# Altium PCB SiLPA.PcbDoc (part 8 of 10)
Units mm, origin at the board's own origin, x right, y up, seen from the top; angles counter-clockwise.
Board outline 222.36 x 100 mm, 4 copper layers (L1, P2, L3, L4), stack 1.598 mm thick; 583 components, 330 nets, 1692 pads, 1781 vias.
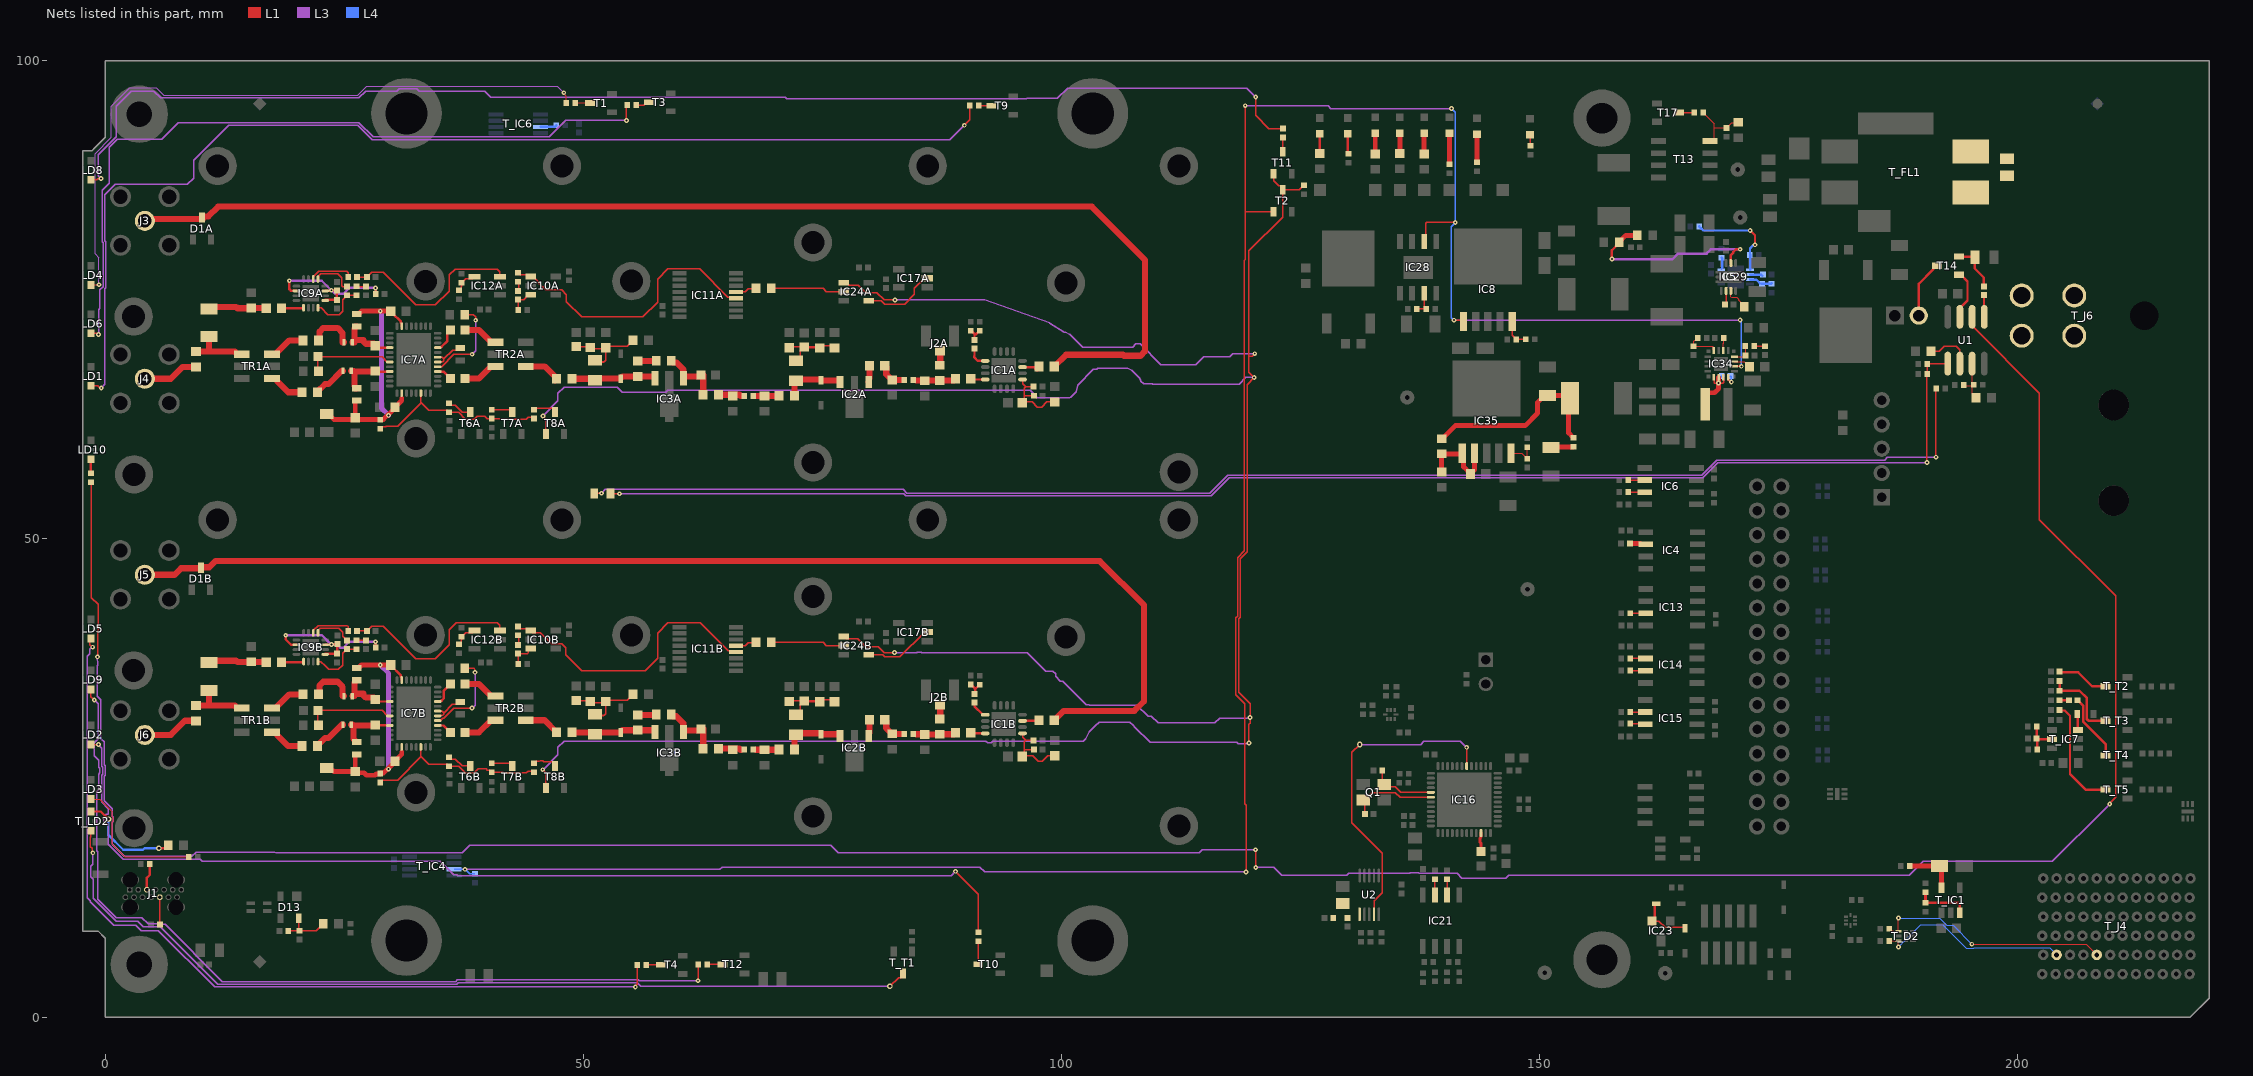
[diagram p8: the nets of this part, all layers, seen from the top]

## Via types
v1: diameter 0.5, hole 0.2, L1 to L4, tented both sides, 1301 vias
v2: diameter 0.6, hole 0.3, L1 to L4, tented both sides, 443 vias
v3: diameter 0.8, hole 0.5, L1 to L4, tented both sides, 25 vias
v4: diameter 0.5, hole 0.2, L1 to L4, 8 vias
v5: diameter 1.27, hole 0.711, L1 to L4, tented both sides, 4 vias

## Nets (pads, with @x,y where several pads share a name; then routed paths per layer and width w, separated by ;. In a path a pad name is that pad's centre, name@x,y a point inside that pad or via, vN(x,y) a via of type N, cw(c..) or ccw(c..) an arc to the next point about the centre after c; other vN are vias at no path point) (continued)
LDAC: IC16.42 U2.4 | length 33.4
  L1 w0.152: v2(131.169,28.501) 130.337,27.669 130.337,20.317 133.534,17.12 133.534,13.025 132.663,12.154 U2.4@132.663,10.75 ; IC16.42@142.353,26.192 v1(142.353,28.208)
  L3 w0.152: v2(131.169,28.501) 137.525,28.501 137.863,28.839 141.702,28.839 142.333,28.208 v1(142.353,28.208)
LED_bias00: LD4.1 R11.1 | length 70.7
  L1 w0.127: LD4.1@-1.5,76.559 -1.484,76.575 v1(-0.662,76.575) ; v1(47.95,96.65) 47.95,96.549 48.205,96.294 48.205,95.615 R11.1@48.22,95.6
  L3 w0.127: v1(-0.662,76.575) -0.662,79.398 -1.07,79.806 -1.07,90.274 0.643,91.988 0.643,95.233 2.566,97.156 5.332,97.156 6.096,96.392 26.391,96.392 27.357,97.358 47.242,97.358 v1(47.95,96.65)
LED_bias01: LD6.1 R12.1 | length 79.1
  L1 w0.152: LD6.1@-1.5,71.5 -0.878,71.5 -0.753,71.375 v1(-0.7,71.375) ; v1(54.5,93.754) 54.5,95.265 R12.1@54.595,95.36
  L3 w0.152: v1(-0.7,71.375) -0.7,73.969 -0.563,74.106 -0.563,76.033 -0.209,76.387 -0.209,80.962 -0.321,81.075 -0.321,86.441 0.428,87.19 0.428,90.975 1.239,91.785 5.903,91.785 7.647,93.529 26.509,93.529 28.009,92.029 46.447,92.029 48.171,93.754 v1(54.5,93.754)
LED_bias10: LD5.1 R14.1 | length 91.2
  L1 w0.152: LD5.1@-1.5,39.582 -1.625,39.457 -1.625,38.921 -1.384,38.68 v1(-1.316,38.68) ; v1(55.425,3.15) 55.425,3.244 55.606,3.425 55.606,5.438 R14.1@55.636,5.468
  L3 w0.152: v1(-1.316,38.68) -1.384,38.68 -1.625,38.439 -1.625,37.985 -1.88,37.73 -1.88,12.499 -1.553,12.172 -1.553,12.057 0.903,9.6 3.175,9.6 3.758,9.017 5.558,9.017 11.425,3.15 v1(55.425,3.15)
LED_bias11: LD9.1 R15.1 | length 91
  L1 w0.152: LD9.1@-1.5,34.25 -1.5,33.517 v1(-1.153,33.17) ; v1(61.979,3.797) 61.979,5.478 R15.1@62.009,5.508
  L3 w0.152: v1(-1.153,33.17) -0.734,32.752 -0.734,29.107 -1.153,28.688 -1.153,27.348 -0.671,26.865 -0.671,26.133 -0.563,26.025 -0.563,25.525 -0.671,25.417 -0.671,23.751 -0.878,23.544 -0.878,17.393 -0.774,17.289 -0.774,12.344 1.169,10.4 3.829,10.4 4.485,9.743 5.856,9.743 5.905,9.693 6.249,9.693 12.234,3.709 36.624,3.709 36.815,3.9 55.711,3.9 55.814,3.797 v1(61.979,3.797)
LED_DIS0: LD1.1 R74.1 | length 119.2
  L1 w0.152: LD1.1@-1.5,66.021 -0.765,66.021 -0.519,65.775 v1(-0.425,65.775) ; v1(89.825,93.25) 90.409,93.834 R74.1@90.409,95.3
  L3 w0.152: v1(-0.425,65.775) -0.042,66.158 -0.042,76.159 0.071,76.272 0.071,81.078 -0.042,81.191 -0.042,85.997 1.054,87.093 8.56,87.093 8.59,87.063 9.226,87.699 9.226,89.592 12.884,93.25 26.394,93.25 27.894,91.75 88.325,91.75 v1(89.825,93.25)
LED_DIS1: LD2.1 R84.1 | length 110
  L1 w0.152: LD2.1@-1.5,28.5 v1(-0.7,28.5) ; v1(88.9,15.24) 91.3,12.84 R84.1@91.3,8.87 R84.1@91.3,8.8
  L3 w0.152: v1(-0.7,28.5) -0.7,28.441 -0.391,28.132 -0.391,26.248 -0.283,26.141 -0.283,25.409 -0.391,25.302 -0.391,22.494 0.328,21.775 0.328,21.2 0.12,21.2 -0.175,20.905 -0.175,20.488 0.12,20.193 0.328,20.193 0.328,18.063 1.863,16.528 9.931,16.528 10.159,16.3 35,16.3 36.418,14.883 36.774,14.883 36.869,14.787 88.446,14.787 v1(88.9,15.24)
LED_OVT: LD8.1 R64.1 | length 136.7
  L1 w0.152: LD8.1@-1.5,87.55 -0.919,87.55 -0.802,87.667 -0.446,87.667 v1(-0.438,87.675) ; v1(120.3,96.2) 120.3,94.292 121.678,92.914 R64.1@123.14,92.914
  L3 w0.152: v1(-0.438,87.675) -0.758,87.995 -0.758,90.181 1.123,92.061 1.123,95.251 2.697,96.825 5.088,96.825 5.788,96.125 26.501,96.125 27.212,96.836 30.478,96.836 30.733,97.092 32.561,97.092 32.817,96.836 39.689,96.836 40.328,96.197 52.806,96.197 52.812,96.203 71.115,96.203 71.271,96.047 96.34,96.047 96.372,96.078 98.749,96.078 98.767,96.096 99.184,96.096 99.202,96.078 99.545,96.078 100.613,97.147 119.353,97.147 v1(120.3,96.2)
LED_P3V3: LD3.1 R13.1 | length 14.8
  L1 w0.127: LD3.1@-1.5,22.8 -0.597,22.8 0.75,21.453 0.75,20.968 0.819,20.9 0.819,20.493 0.75,20.424 0.75,18.054 2.049,16.754 R13.1@8.73,16.754
NetC1A_1: C1A.1 IC1A.9 | length 2.2
  L1 w0.254: C1A.1@90.89,69.89 90.89,69.137 90.875,69.121 90.875,68.98 91.234,68.621 IC1A.9@92.012,68.621
NetC1A_2: C1A.2 R1A.2 R2A.2 | length 1.9
  L1 w0.254: R1A.2@90.5,71.78 90.52,71.78 90.89,71.41 ; C1A.2@90.89,70.79 90.89,71.41 ; R2A.2@91.44,71.77 91.42,71.77 91.06,71.41 90.89,71.41
NetC1B_1: C1B.1 IC1B.9 | length 1.9
  L1 w0.254: C1B.1@90.89,32.89 90.89,32.493 91.762,31.621 IC1B.9@92.012,31.621
NetC1B_2: C1B.2 R1B.2 R2B.2 | length 1.6
  L1 w0.254: R1B.2@90.5,34.78 90.52,34.78 90.925,34.375 90.925,34.35 ; C1B.2@90.89,33.79 90.953,33.853 90.953,34.303 R2B.2@91.3,34.65
NetC2A_2: C2A.2 C15A.2 IC3A.1 R3A.1 | length 6.6
  L1 w0.643: R3A.1@59.2,68.64 59.2,68.59 59.329,68.461 59.699,68.461 60.441,67.719 60.441,67.244 60.444,67.242 60.475,67.242 IC3A.1@60.475,67.001 ; IC3A.1@60.475,66.815 IC3A.1@60.475,67.001 ; C2A.2@62.31,67.12 62.158,66.968 60.509,66.968 IC3A.1@60.475,67.001 ; C15A.2@62.52,65.07 C2A.2@62.52,67.15
NetC2B_2: C2B.2 C15B.2 IC3B.1 R3B.1 | length 6.6
  L1 w0.643: R3B.1@59.2,31.64 59.2,31.59 59.329,31.461 59.699,31.461 60.441,30.719 60.441,30.244 60.444,30.242 60.475,30.242 IC3B.1@60.475,30.001 ; IC3B.1@60.475,29.815 IC3B.1@60.475,30.001 ; C2B.2@62.31,30.12 62.158,29.968 60.509,29.968 IC3B.1@60.475,30.001 ; C15B.2@62.52,28.07 C2B.2@62.52,30.15
NetC3A_1: C3A.1 R3A.2 | length 1.9
  L1 w0.643: C3A.1@55.69,68.6 57.56,68.6 R3A.2@57.6,68.64
NetC3A_2: C3A.2 C16A.1 D3A.2 IC3A.3 L4A.2 | length 9
  L1 w0.643: C16A.1@48.78,66.771 48.798,66.753 L4A.2@51.182,66.753 ; L4A.2@51.2,66.735 L4A.2@51.182,66.753 ; C3A.2@55.69,66.99 57.441,66.99 57.475,66.956 IC3A.3@57.475,66.815 ; C3A.2@55.69,67 54.073,67 53.89,66.817 D3A.2@53.89,66.76 51.189,66.76 L4A.2@51.182,66.753
NetC3B_1: C3B.1 R3B.2 | length 1.9
  L1 w0.643: C3B.1@55.69,31.6 57.56,31.6 R3B.2@57.6,31.64
NetC3B_2: C3B.2 C16B.1 D3B.2 IC3B.3 L4B.2 | length 9
  L1 w0.643: C16B.1@48.78,29.771 48.798,29.753 L4B.2@51.182,29.753 ; L4B.2@51.2,29.735 L4B.2@51.182,29.753 ; C3B.2@55.69,29.99 57.441,29.99 57.475,29.956 IC3B.3@57.475,29.815 ; C3B.2@55.69,30 54.073,30 53.89,29.817 D3B.2@53.89,29.76 51.189,29.76 L4B.2@51.182,29.753
NetC4A_2: C4A.2 C5A.2 C6A.2 L1A.2 L3A.1 | length 8.4
  L1 w0.152: C6A.2@71.52,69.99 71.61,70.08 73.125,70.08 74.609,70.08 C5A.2@74.715,69.974 74.941,70.2 76.02,70.2 L1A.2@76.25,69.97 ; L3A.1@72.22,68.648 72.676,69.104 72.676,69.651 73.075,70.05 C4A.2@73.1,70.05 ; C4A.2@73.125,70.05 73.176,69.999 C5A.2@74.715,69.999
NetC4B_2: C4B.2 C5B.2 C6B.2 L1B.2 L3B.1 | length 8.4
  L1 w0.152: C6B.2@71.52,32.99 71.61,33.08 73.125,33.08 74.609,33.08 C5B.2@74.715,32.974 74.941,33.2 76.02,33.2 L1B.2@76.25,32.97 ; L3B.1@72.22,31.693 72.265,31.693 72.676,32.104 72.676,32.651 73.075,33.05 C4B.2@73.1,33.05 ; C4B.2@73.125,33.05 73.176,32.999 C5B.2@74.715,32.999
NetC7A_2: C7A.2 C8A.2 C9A.2 L2A.1 L4A.1 | length 11.7
  L1 w0.152: C9A.2@49.26,70.1 50.615,70.1 50.847,70.1 50.756,70.009 C8A.2@50.731,70.009 50.86,69.88 51.659,69.88 52.2,69.88 C7A.2@52.31,69.99 ; L4A.1@50.885,68.86 L4A.1@51.2,68.545 ; L2A.1@55.19,70.77 55.19,70.745 54.576,70.131 52.734,70.131 52.31,69.707 C7A.2@52.31,69.702 ; L4A.1@51.2,68.545 52.15,68.545 52.31,68.705 ; L4A.1@51.2,68.545 51.26,68.485 52.09,68.485 52.31,68.705 ; 52.31,68.705 C7A.2@52.31,69.702 ; C7A.2@52.31,69.702 C7A.2@52.31,69.99 ; C7A.2@52.31,69.99 52.594,70.274 C7A.2@52.31,69.99
NetC7B_2: C7B.2 C8B.2 C9B.2 L2B.1 L4B.1 | length 11.7
  L1 w0.152: C9B.2@49.26,33.1 50.615,33.1 50.847,33.1 50.756,33.009 C8B.2@50.731,33.009 50.86,32.88 51.659,32.88 52.2,32.88 C7B.2@52.31,32.99 ; L4B.1@50.885,31.86 L4B.1@51.2,31.545 ; L2B.1@55.19,33.77 55.19,33.745 54.576,33.131 52.734,33.131 52.31,32.707 C7B.2@52.31,32.702 ; L4B.1@51.2,31.545 51.26,31.485 52.09,31.485 52.31,31.705 ; L4B.1@51.2,31.545 52.15,31.545 52.31,31.705 ; 52.31,31.705 C7B.2@52.31,32.702 ; C7B.2@52.31,32.702 C7B.2@52.31,32.99 ; C7B.2@52.31,32.99 52.594,33.274 C7B.2@52.31,32.99
NetC11A_1: C11A.1 D1A.3 J3.1 | length 127.6
  L1 w0.643: J3.1@4.134,83.25 4.355,83.471 10.211,83.471 10.112,83.571 10.112,83.72 10.115,83.724 10.778,83.724 11.805,84.75 103.15,84.75 108.716,79.184 108.716,69.608 108.263,69.155 106.54,69.155 106.432,69.263 100.463,69.263 C11A.1@99.23,68.03
NetC11A_2: C11A.2 IC1A.3 | length 1.9
  L1 w0.254: IC1A.3@95.912,67.971 97.332,67.971 C11A.2@97.451,67.851
  L1 w0.643: C11A.2@97.451,67.851 97.476,67.851 97.63,68.005 C11A.2@97.63,68.03
NetC11B_1: C11B.1 D1B.3 J5.1 | length 127.3
  L1 w0.643: J5.1@4.134,46.25 7.246,46.25 7.934,46.938 9.996,46.938 10,46.941 10,47.041 10.004,47.044 10.871,47.044 11.517,47.69 104.009,47.69 108.6,43.099 108.6,33 107.618,32.018 100.218,32.018 C11B.1@99.23,31.03
NetC11B_2: C11B.2 IC1B.3 | length 1.8
  L1 w0.254: IC1B.3@95.912,30.971 97.596,30.971 C11B.2@97.63,31.005
  L1 w0.643: C11B.2@97.63,31.005 C11B.2@97.63,31.03
NetC12A_1: C12A.1 IC1A.12 | length 1.5
  L1 w0.254: C12A.1@90.5,66.75 90.579,66.671 IC1A.12@92.012,66.671
NetC12A_2: C12A.2 R4A.2 R6A.1 R7A.2 | length 4.2
  L1 w0.643: 84.777,66.58 85.64,66.58 R7A.2@85.67,66.55 85.68,66.56 87.25,66.56 R4A.2@87.26,66.57 88.745,66.57 88.9,66.725 C12A.2@88.9,66.75
NetC12B_1: C12B.1 IC1B.12 | length 1.5
  L1 w0.254: C12B.1@90.5,29.75 90.579,29.671 IC1B.12@92.012,29.671
NetC12B_2: C12B.2 R4B.2 R6B.1 R7B.2 | length 4.2
  L1 w0.643: 84.777,29.58 85.64,29.58 R7B.2@85.67,29.55 85.68,29.56 87.25,29.56 R4B.2@87.26,29.57 88.745,29.57 88.9,29.725 C12B.2@88.9,29.75
NetC13A_1: C13A.1 R6A.2 R8A.2 | length 2.9
  L1 w0.643: C13A.1@81.5,68.1 81.654,67.946 81.654,67.216 82.25,66.62 R6A.2@83.369,66.62
NetC13A_2: C13A.2 IC2A.1 | length 1.7
  L1 w0.643: IC2A.1@79.833,66.394 79.862,66.423 79.862,66.756 79.9,66.794 C13A.2@79.9,68.1
NetC13B_1: C13B.1 R6B.2 R8B.2 | length 2.9
  L1 w0.643: C13B.1@81.5,31.1 81.654,30.946 81.654,30.216 82.25,29.62 R6B.2@83.369,29.62
NetC13B_2: C13B.2 IC2B.1 | length 1.4
  L1 w0.643: IC2B.1@79.875,29.675 79.9,29.7 C13B.2@79.9,31.1
NetC14A_1: C14A.1 D2A.2 IC2A.3 L3A.2 | length 6.6
  L1 w0.643: C14A.1@72.05,64.979 72.05,66.505 72.22,66.675 74.85,66.675 D2A.2@74.85,66.58 76.804,66.58 76.833,66.551 IC2A.3@76.833,66.394
NetC14A_2: C14A.2 R5A.1 R9A.2 | length 2.4
  L1 w0.643: R5A.1@68.04,64.959 70.431,64.959 C14A.2@70.45,64.979
NetC14B_1: C14B.1 D2B.2 IC2B.3 L3B.2 | length 6.6
  L1 w0.643: C14B.1@72.05,27.979 72.05,29.505 72.22,29.675 74.85,29.675 D2B.2@74.85,29.58 76.804,29.58 76.833,29.551 IC2B.3@76.833,29.394
NetC14B_2: C14B.2 R5B.1 R9B.2 | length 2.4
  L1 w0.643: R5B.1@68.04,27.959 70.431,27.959 C14B.2@70.45,27.979
NetC15A_1: C15A.1 R5A.2 R10A.2 | length 2.4
  L1 w0.643: C15A.1@64.12,65.07 66.32,65.07 66.45,64.94
NetC15B_1: C15B.1 R5B.2 R10B.2 | length 2.4
  L1 w0.643: C15B.1@64.12,28.07 66.32,28.07 66.45,27.94
NetC16A_2: C16A.2 TR2A.3 | length 4.1
  L1 w0.643: TR2A.3@43.965,68.033 45.944,68.033 47.027,66.95 47.027,66.596 C16A.2@47.18,66.75
NetC16B_2: C16B.2 TR2B.3 | length 3.8
  L1 w0.643: TR2B.3@43.965,31.033 45.944,31.033 47.18,29.796 C16B.2@47.18,29.771
NetC17A_1: C17A.1 C18A.2 C19A.2 IC1A.1 L5A.1 | length 8.3
  L1 w0.152: C18A.2@95.89,64.25 C18A.2@95.97,64.33 ; IC1A.1@95.912,66.671 95.912,66.242 96.224,65.93 ; C17A.1@97.08,65.93 96.224,65.93 ; C19A.2@97.09,64.97 96.068,64.97 ; L5A.1@99.29,64.33 98.465,64.33 97.922,63.787 97.473,63.787 96.93,64.33 C18A.2@95.97,64.33 ; C18A.2@95.97,64.33 96.068,64.428 96.068,64.97 ; 96.068,64.97 96.068,65.774 96.224,65.93
NetC17B_1: C17B.1 C18B.2 C19B.2 IC1B.1 L5B.1 | length 8.4
  L1 w0.152: C18B.2@95.89,27.25 C18B.2@95.97,27.33 ; IC1B.1@95.912,29.671 95.912,29.242 96.224,28.93 ; C17B.1@97.08,28.93 96.224,28.93 ; C19B.2@97.09,27.97 96.068,27.97 ; L5B.1@99.29,27.33 98.531,27.33 97.947,26.747 97.572,26.747 96.989,27.33 C18B.2@95.97,27.33 ; C18B.2@95.97,27.33 96.068,27.428 96.068,27.97 ; 96.068,27.97 96.068,28.774 96.224,28.93
NetC20_2: C20.2 C21.2 FB3.1 U2.1
NetC24_2: C24.2 L6.2 L7.1 R99.2 | length 20.5
  L1 w0.508: L7.1@139.744,60.487 139.794,60.487 141.157,61.85 148.458,61.85 149.773,63.165 149.773,64.298 150.475,65 C24.2@150.8,65 152.85,65 L6.2@153.15,64.7 153.005,64.555 153.005,61.085 153.461,60.629 153.461,60.609 153.497,60.573 R99.2@153.517,60.573
NetC26_2: C26.2 IC35.1 IC35.2 L7.2 R97.1 | length 8.8
  L1 w0.508: R97.1@139.724,57 139.734,57.01 139.734,58.877 L7.2@139.744,58.887 141.831,58.887 142.026,58.692 142.026,57.531 C26.2@142.744,56.813 ; C26.2@142.744,56.788 C26.2@142.744,56.813 ; IC35.2@143.17,58.955 143.17,57.239 C26.2@142.744,56.813
NetC36_1: C36.1 IC5.9 | length 1.5
  L1 w0.152: C36.1@169.25,74.5 169.479,74.729 IC5.9@169.479,75.94
NetC39A_2: C39A.2 C48A.2 C49A.2 IC7A.19 IC7A.34 L11A.1 L12A.2 L15A.2 R19A.1 | length 28.3
  L1 w0.254: C48A.2@30.05,73.625 30.05,73.585 30.904,72.731 30.904,72.608 31,72.512 IC7A.19@31,72.25
  L1 w0.508: L11A.1@23.16,63.06 23.335,63.06 23.889,62.506 C39A.2@26.305,62.506 ; C39A.2@26.01,62.762 26.136,62.887 26.136,64.404 26.202,64.47 L15A.2@26.285,64.47 ; C39A.2@26.136,62.675 C39A.2@26.305,62.506 ; L12A.2@26.286,73.505 26.476,73.505 26.786,73.815 v1(28.75,73.815) C48A.2@29.845,73.815 29.845,73.79 C48A.2@30.05,73.585 ; 31,64.75 31,64.475 30.3,63.775 C49A.2@30.3,63.75 30.3,63.725 29.081,62.506 C39A.2@26.305,62.506
  L3 w0.508: v1(28.75,73.815) 28.881,73.684 28.881,63.667 v1(29.625,62.923)
NetC39B_2: C39B.2 C48B.2 C49B.2 IC7B.19 IC7B.34 L11B.1 L12B.2 L15B.2 R19B.1 | length 28.2
  L1 w0.254: C48B.2@29.845,36.815 29.845,36.79 30.904,35.731 30.904,35.608 31,35.512 IC7B.19@31,35.25
  L1 w0.508: L11B.1@23.16,26.06 23.431,25.789 23.79,25.789 23.904,25.675 26.01,25.675 26.136,25.8 26.136,27.404 26.202,27.47 L15B.2@26.285,27.47 ; C39B.2@26.136,25.675 26.259,25.552 27.049,25.552 27.31,25.292 28.211,25.292 28.354,25.434 28.714,25.434 R19B.1@28.75,25.47 28.786,25.506 29.081,25.506 30.3,26.725 C49B.2@30.3,26.75 30.3,26.775 31,27.475 31,27.75 ; L12B.2@26.286,36.505 26.476,36.505 26.786,36.815 v1(28.75,36.815) C48B.2@29.845,36.815
  L3 w0.508: v1(28.75,36.815) 29.625,35.94 v1(29.625,25.923)
NetC41A_1: C41A.1 IC7A.24 L12A.1 L13A.1 | length 6.2
  L1 w0.254: C41A.1@28.25,70.25 28.5,70 IC7A.24@29.75,70
  L1 w0.643: L13A.1@25.852,70.56 26.063,70.56 26.063,70.81 ; L12A.1@26.286,72.225 26.099,72.225 26.098,72.224 26.098,72.036 26.063,72.001 26.063,70.81 ; C41A.1@28.25,70.25 28.096,70.404 27.243,70.404 26.983,70.664 26.983,70.81 26.063,70.81
NetC41B_1: C41B.1 IC7B.24 L12B.1 L13B.1 | length 6.2
  L1 w0.254: C41B.1@28.096,33.404 28.5,33 IC7B.24@29.75,33
  L1 w0.643: L13B.1@25.852,33.56 26.063,33.56 26.063,33.81 ; L12B.1@26.286,35.225 26.099,35.225 26.098,35.224 26.098,35.036 26.063,35.001 26.063,33.81 ; C41B.1@28.096,33.404 27.243,33.404 26.983,33.664 26.983,33.81 26.063,33.81
NetC42A_1: C42A.1 TR2A.6 | length 3.7
  L1 w0.643: C42A.1@37.614,71.849 39.064,71.849 40.34,70.573 TR2A.6@40.785,70.573
NetC42A_2: C42A.2 IC7A.9 | length 2.6
  L1 w0.254: IC7A.9@34.75,70 35.012,70 35.108,70.096 35.167,70.096 35.766,70.695 35.766,71.501 C42A.2@36.114,71.849
NetC42B_1: C42B.1 TR2B.6 | length 3.7
  L1 w0.643: C42B.1@37.614,34.849 39.064,34.849 40.34,33.573 TR2B.6@40.785,33.573
NetC42B_2: C42B.2 IC7B.9 | length 2.6
  L1 w0.254: IC7B.9@34.75,33 35.012,33 35.108,33.096 35.167,33.096 35.407,33.335 35.407,34.141 C42B.2@36.114,34.849
NetC43A_1: C43A.1 L13A.2 | length 4.9
  L1 w0.643: C43A.1@22.29,70.75 22.409,70.869 22.409,71.684 22.786,72.06 24.283,72.06 24.82,71.522 24.82,70.564 24.824,70.56 L13A.2@24.967,70.56
NetC43A_2: C43A.2 TR1A.4 | length 3.9
  L1 w0.643: TR1A.4@17.445,69.317 17.89,69.317 17.949,69.376 17.949,69.448 19.251,70.75 C43A.2@20.69,70.75 C43A.2@20.69,70.725
NetC43B_1: C43B.1 L13B.2 | length 4.9
  L1 w0.643: C43B.1@22.29,33.75 22.409,33.869 22.409,34.684 22.786,35.06 24.283,35.06 24.82,34.522 24.82,33.564 24.824,33.56 L13B.2@24.967,33.56
NetC43B_2: C43B.2 TR1B.4 | length 3.9
  L1 w0.643: TR1B.4@17.445,32.317 17.89,32.317 17.949,32.376 17.949,32.448 19.251,33.75 C43B.2@20.69,33.75
NetC44A_1: C44A.1 R73A.2 TR1A.3 | length 6.8
  L1 w0.643: C44A.1@9.488,69.58 10.807,69.58 ; R73A.2@10.515,71.153 R73A.2@10.84,71.153 10.84,69.613 10.807,69.58 ; TR1A.3@14.265,69.317 13.82,69.317 13.557,69.58 10.807,69.58
NetC44A_2: C44A.2 J4.1 | length 5.9
  L1 w0.643: J4.1@4.134,66.75 6.851,66.75 8.081,67.98 C44A.2@9.488,67.98
NetC44B_1: C44B.1 R73B.2 TR1B.3 | length 6.5
  L1 w0.643: C44B.1@9.488,32.58 10.807,32.58 ; R73B.2@10.84,34.153 10.84,32.613 10.807,32.58 ; TR1B.3@14.265,32.317 13.82,32.317 13.557,32.58 10.807,32.58
NetC44B_2: C44B.2 J6.1 | length 6
  L1 w0.643: J6.1@4.134,29.5 6.851,29.5 8.331,30.98 C44B.2@9.488,30.98
NetC45A_1: C45A.1 TR2A.4 | length 3.7
  L1 w0.643: C45A.1@37.6,66.758 39.065,66.758 40.34,68.033 TR2A.4@40.785,68.033
NetC45A_2: C45A.2 IC7A.4 | length 1.8
  L1 w0.254: IC7A.4@34.75,67.5 34.759,67.491 35.367,67.491 C45A.2@36.1,66.758
  L1 w0.643: C45A.2@36.1,66.758 C45A.2@36.1,66.894
NetC45B_1: C45B.1 TR2B.4 | length 3.9
  L1 w0.643: C45B.1@37.753,29.912 C45B.1@37.6,29.758 39.065,29.758 40.34,31.033 TR2B.4@40.785,31.033
NetC45B_2: C45B.2 IC7B.4 | length 1.8
  L1 w0.254: IC7B.4@34.75,30.5 34.759,30.491 35.367,30.491 C45B.2@36.1,29.758
  L1 w0.643: C45B.2@36.1,29.758 C45B.2@36.1,29.894
NetC46A_1: C46A.1 L17A.2 | length 3.6
  L1 w0.643: C46A.1@22.17,65.344 22.17,65.369 23.001,66.2 23.343,66.2 24.719,67.576 L17A.2@24.861,67.576
NetC46A_2: C46A.2 TR1A.6 | length 3.9
  L1 w0.643: TR1A.6@17.445,66.777 17.89,66.777 17.949,66.718 17.949,66.526 19.131,65.344 C46A.2@20.57,65.344 C46A.2@20.57,65.369
NetC46B_1: C46B.1 L17B.2 | length 3.6
  L1 w0.643: C46B.1@22.17,28.344 22.17,28.369 23.001,29.2 23.343,29.2 24.719,30.576 L17B.2@24.861,30.576
NetC46B_2: C46B.2 TR1B.6 | length 3.9
  L1 w0.643: TR1B.6@17.445,29.777 17.89,29.777 17.949,29.718 17.949,29.526 19.131,28.344 C46B.2@20.57,28.344 C46B.2@20.57,28.369
NetC47A_2: C47A.2 IC7A.29 L15A.1 L17A.1 | length 6
  L1 w0.254: C47A.2@28.25,67.5 IC7A.29@29.75,67.5
  L1 w0.643: L17A.1@25.711,67.576 25.715,67.572 25.981,67.572 26.054,67.5 ; L15A.1@26.285,65.75 26.098,65.75 26.096,65.751 26.096,65.939 26.058,65.978 26.058,66.523 26.054,66.523 26.054,67.5 ; C47A.2@28.25,67.5 26.054,67.5
NetC47B_2: C47B.2 IC7B.29 L15B.1 L17B.1 | length 6.1
  L1 w0.254: C47B.2@28.25,30.5 IC7B.29@29.75,30.5
  L1 w0.643: L17B.1@25.711,30.576 25.854,30.576 25.93,30.5 28.2,30.5 C47B.2@28.25,30.55 ; 25.958,30.5 25.958,29.077 26.096,28.939 26.096,28.751 26.098,28.75 L15B.1@26.285,28.75
NetC50A_2: C50A.2 IC7A.27 R21A.2 | length 9.3
  L1 w0.152: R21A.2@22.29,67.521 22.24,67.571 C50A.2@22.24,69.06 28.94,69.06 29.5,68.5 IC7A.27@29.75,68.5
NetC50B_2: C50B.2 IC7B.27 R21B.2 | length 9.3
  L1 w0.152: R21B.2@22.29,30.521 22.24,30.571 C50B.2@22.24,32.06 28.94,32.06 29.5,31.5 IC7B.27@29.75,31.5
NetC51A_1: C51A.1 IC10A.3 R52A.2 | length 2.6
  L1 w0.152: R52A.2@43.16,73.92 C51A.1@43.16,75.03 43.74,75.03 44.24,75.53 IC10A.3@44.49,75.53
NetC51A_2: C51A.2 R23A.1 | length 1.1
  L1 w0.152: C51A.2@43.16,75.93 43.25,76.02 R23A.1@43.25,77
NetC51B_1: C51B.1 IC10B.3 R52B.2 | length 3.2
  L1 w0.152: C51B.1@43.16,38.03 C51B.1@43.16,38 ; R52B.2@43.186,36.92 43.16,36.946 C51B.1@43.16,37.84 ; C51B.1@43.186,37.814 C51B.1@43.16,37.84 ; IC10B.3@44.49,38.53 44.474,38.53 44.25,38.306 44.25,38.089 44.161,38 C51B.1@43.16,38 ; C51B.1@43.16,37.84 C51B.1@43.16,38 ; C51B.1@43.16,37.84 43,38 C51B.1@43.16,38
NetC51B_2: C51B.2 R23B.1 | length 1.1
  L1 w0.152: C51B.2@43.16,38.93 43.25,39.02 R23B.1@43.25,40
NetC52A_1: C52A.1 R27A.2 R73A.1 | length 6.1
  L1 w0.643: R73A.1@10.84,74.053 11.048,74.26 13.68,74.26 13.825,74.115 R27A.2@15.28,74.115 ; R27A.2@15.28,74.15 15.295,74.135 16.815,74.135 C52A.1@16.83,74.12
NetC52A_2: C52A.2 IC9A.1 | length 2.4
  L1 w0.254: C52A.2@18.43,74.12 20.719,74.12 20.74,74.141 IC9A.1@20.74,74.18
NetC52B_1: C52B.1 R27B.2 R73B.1 | length 6.1
  L1 w0.643: R73B.1@10.84,37.053 11.048,37.26 13.68,37.26 13.825,37.115 R27B.2@15.28,37.115 ; R27B.2@15.28,37.15 15.295,37.135 16.815,37.135 C52B.1@16.83,37.12
NetC52B_2: C52B.2 IC9B.1 | length 2.4
  L1 w0.254: C52B.2@18.43,37.12 20.719,37.12 20.74,37.141 IC9B.1@20.74,37.18
NetC53A_2: C53A.2 IC12A.3 R24A.2 | length 19.6
  L1 w0.152: R24A.2@26.322,77.375 27.141,77.375 27.25,77.484 C53A.2@27.25,77.5 ; C53A.2@27.375,77.375 27.761,77.762 27.761,77.769 27.88,77.888 29.051,77.888 32.472,74.467 34.528,74.467 35.983,75.922 35.983,77.599 36.597,78.213 40.985,78.213 41.25,77.948 IC12A.3@41.25,77.5
NetC53B_2: C53B.2 IC12B.3 R24B.2 | length 19.5
  L1 w0.152: R24B.2@26.322,40.375 27.141,40.375 27.25,40.484 C53B.2@27.25,40.5 ; C53B.2@27.375,40.375 27.761,40.762 27.761,40.769 27.88,40.888 29.051,40.888 32.472,37.467 34.528,37.467 35.983,38.922 35.983,40.517 36.678,41.213 40.985,41.213 41.25,40.948 IC12B.3@41.25,40.5
NetC54A_1: C54A.1 IC9A.4 R31A.2 | length 6.2
  L1 w0.152: IC9A.4@22.24,74.18 22.566,74.18 23.28,73.467 24.483,73.467 24.828,73.812 24.828,75.021 C54A.1@25.286,75.48 25.52,75.714 25.52,75.46 R31A.2@26.275,75.46
NetC54A_2: C54A.2 IC9A.9 | length 4.4
  L1 w0.152: IC9A.9@22.24,77.18 22.24,77.43 22.517,77.707 24.312,77.707 24.725,77.295 24.725,76.469 24.814,76.38 C54A.2@25.286,76.38
NetC54B_1: C54B.1 IC9B.4 R31B.2 | length 6.3
  L1 w0.152: IC9B.4@22.24,37.18 22.548,37.18 22.992,36.735 23.366,36.362 24.378,36.362 24.828,36.812 24.828,38.021 C54B.1@25.286,38.48 25.52,38.714 25.52,38.46 R31B.2@26.275,38.46
NetC54B_2: C54B.2 IC9B.9 | length 4.2
  L1 w0.152: IC9B.9@22.24,40.18 22.24,40.43 22.466,40.656 24.428,40.656 24.837,40.247 24.837,39.829 C54B.2@25.286,39.38
NetC55A_1: C55A.1 R31A.1 | length 1
  L1 w0.152: R31A.1@26.275,76.4 26.295,76.38 C55A.1@27.27,76.38
NetC55B_1: C55B.1 R31B.1 | length 1
  L1 w0.152: R31B.1@26.275,39.4 26.295,39.38 C55B.1@27.27,39.38
NetC59A_2: C59A.2 C60A.1 FB2A.2 IC9A.5 IC9A.7 IC9A.14 | length 15.6
  L1 w0.254: v1(19.245,77) 19.245,76.121 19.436,75.93 IC9A.14@19.99,75.93 ; IC9A.7@22.99,75.93 22.999,75.939 23.453,75.939 23.467,75.953 23.534,75.953 23.581,76 23.591,75.99 24.24,75.99 C60A.1@24.25,76 ; IC9A.5@23,75 C59A.2@24.209,75 ; C60A.1@24.209,75.98 24.209,75.041 C59A.2@24.25,75 ; v1(28.25,76.25) 28.26,76.24 28.26,75.64 FB2A.2@28.27,75.63
  L3 w0.254: v1(19.245,77) 22.634,77 v1(23.634,76) ; v1@23.671,76.029 24.075,75.626 24.876,75.626 25.5,76.25 v1(28.25,76.25)
NetC59B_2: C59B.2 C60B.1 FB2B.2 IC9B.5 IC9B.7 IC9B.14 | length 16.2
  L1 w0.254: v1(18.866,39.925) 18.866,39.502 19.43,38.939 19.981,38.939 IC9B.14@19.99,38.93 ; IC9B.7@22.99,38.93 22.999,38.939 23.626,38.939 v1(23.639,38.952) ; IC9B.5@23,38 C59B.2@24.209,38 ; v1@23.598,38.95 23.619,38.971 24.267,38.971 C60B.1@24.286,38.99 24.248,38.952 24.248,38.002 C59B.2@24.25,38 ; v1(28.25,39.25) 28.26,39.24 28.26,38.64 FB2B.2@28.27,38.63
  L3 w0.254: v1(18.866,39.925) 22.643,39.925 23.616,38.952 v1(23.639,38.952) ; v1@23.598,38.95 23.642,38.905 24.261,38.905 24.54,38.626 24.876,38.626 25.5,39.25 v1(28.25,39.25)
NetC65_1: C65.1 IC16.5 Q1.1 | length 6.8
  L1 w0.152: C65.1@133.525,25.767 133.525,24.504 Q1.1@133.729,24.3 133.961,24.068 134.868,24.068 135.443,23.492 IC16.5@138.653,23.492
NetC67_1: C67.1 R91.2 T14.2 | length 5.3
  L1 w0.254: T14.2@193.8,79.45 193.875,79.525 195.425,79.525 R91.2@195.475,79.475 ; R91.2@195.475,79.55 R91.2@195.475,79.475 ; R91.2@195.5,79.45 R91.2@195.475,79.475 ; C67.1@196.425,76.4 196.425,77.325 195.475,78.275 R91.2@195.475,79.475
NetC67_2: C67.2 U1.5 | length 2.3
  L1 w0.254: C67.2@196.425,75.5 196.447,75.478 196.447,73.248 U1.5@196.47,73.225
NetC71_2: C71.2 IC16.6 Q1.3 | length 9.2
  L1 w0.152: C71.2@131.715,21.228 131.715,22.513 Q1.3@131.529,22.7 131.654,22.7 132.432,23.478 134.907,23.478 135.393,22.992 IC16.6@138.653,22.992
NetC74_2: C74.2 D13.4 FB4.1 R69.2 | length 5.6
  L1 w0.152: FB4.1@19.05,9.017 19.061,9.028 C74.2@20.204,9.028 ; C74.2@20.193,9.017 C74.2@20.204,9.028 ; D13.4@20.216,10.345 20.216,9.04 C74.2@20.204,9.028 ; R69.2@22.987,9.779 22.834,9.779 22.083,9.028 C74.2@20.32,9.028 C74.2@20.204,9.028
NetC80_2: C80.2 IC16.22 | length 2.1
  L1 w0.3: IC16.22@143.853,19.292 143.853,18.858 143.78,18.785 143.78,18.753 143.751,18.724 143.751,18.279 143.853,18.177 143.853,17.313 C80.2@143.865,17.301
NetC93_2: C93.2 R57.1 R68.2 U1.3 | length 4.4
  L1 w0.127: R57.1@194.5,66 R68.2@195.213,66 ; U1.3@195.2,68.325 195.213,68.312 R68.2@195.213,66 ; R68.2@195.355,66.125 195.23,66 R68.2@195.213,66 ; C93.2@195.5,65 195.425,65 195.213,65.212 R68.2@195.213,66
NetC96_2: C96.2 IC29.6 | length 1.4
  L4 w0.254: IC29.6@171.979,77.64 173.156,77.64 173.25,77.546 C96.2@173.25,77.5
NetC99_1: C99.1 R51.1 R72.2 T13.4 | length 6.2
  L1 w0.127: R72.2@167.082,94.575 167.082,94.555 168.25,93.387 168.25,93 ; T13.4@167.8,91.605 168.013,91.605 168.25,91.842 168.25,93 ; C99.1@169.5,92.95 170.05,93.5 R51.1@170.5,93.5 ; C99.1@169.5,93 168.25,93
NetC106_2: C106.2 R99.1 | length 2.4
  L1 w0.508: C106.2@151.177,59.586 151.211,59.62 153.504,59.62 R99.1@153.517,59.633
NetC108_1: C108.1 IC34.15 | length 1.6
  L1 w0.127: IC34.15@170.35,68.55 171.4,68.55 171.75,68.2 C108.1@171.75,68.175
NetC109_1: C109.1 IC34.12 | length 1.3
  L1 w0.152: IC34.12@169.675,66.8 169.675,66.7 169.969,66.406 v1(170.03,66.406)
  L4 w0.152: C109.1@169.929,67.05 170.033,66.945 170.03,66.942 v1(170.03,66.406)
NetC109_2: C109.2 IC34.9 IC34.10 IC34.11 L14.2 | length 6.8
  L1 w0.152: IC34.9@168.225,66.9 168.243,66.882 168.243,66.321 168.264,66.3 v1(168.7,66.3) 169.136,66.3 169.225,66.389 169.225,66.875 IC34.11@169.2,66.9
  L1 w0.508: L14.2@167.315,64.1 167.315,65.055 167.551,65.291 168.269,65.291 168.7,65.721 v1(168.7,66.3) IC34.10@168.7,66.9
  L4 w0.152: v1(168.7,66.3) 168.7,66.394 168.795,66.489 168.795,66.816 C109.2@169.029,67.05
NetC110_2: C110.2 IC34.16 R104.2 | length 2.2
  L1 w0.127: IC34.16@170.35,69.05 171.425,69.05 C110.2@171.575,69.2 ; R104.2@171.525,70.125 171.525,69.204 C110.2@171.529,69.201
NetC111_2: C111.2 R104.1 | length 1
  L1 w0.152: R104.1@172.429,70.171 173.446,70.171 C111.2@173.45,70.175
NetC112_2: C112.2 U1.2 | length 4.3
  L1 w0.152: C112.2@190.9,69.625 191.75,69.625 192.275,70.15 193.55,70.15 193.9,69.8 193.9,68.95 U1.2@193.975,68.875
NetD10_1: D10.1 D17.1 IC23.2 | length 5.8
  L1 w0.152: IC23.2@161.742,10.038 162.446,10.038 163.106,9.378 165.093,9.378 D10.1@165.182,9.289
  L1 w0.254: IC23.2@161.742,10.038 162.038,10.334 162.038,11.721 162.161,11.844 D17.1@162.195,11.844
NetIC4_2: IC4.2 R16.2 | length 1.7
  L1 w0.508: R16.2@159.429,49.54 160.499,49.54 160.604,49.435 IC4.2@161.079,49.435
NetIC5_5: IC5.5 R28.1 R30.2 | length 20.3
  L1 w0.254: v1(157.539,79.264) 157.525,79.278 157.525,80.175 158.3,80.95 R30.2@158.3,81 ; IC5.5@169.979,78.84 169.987,78.849 169.987,79.67 170.249,79.932 170.249,80.024 170.512,80.286 v1(170.95,80.286)
  L1 w0.508: R30.2@158.3,80.975 158.3,81.05 158.988,81.738 160.188,81.738 R28.1@160.2,81.75
  L3 w0.254: v1(157.539,79.264) 157.553,79.25 163.871,79.25 164.461,79.84 167.449,79.84 167.895,80.286 v1(170.95,80.286)
NetIC5_10: IC5.10 R17.1 | length 2.3
  L1 w0.127: IC5.10@169.979,75.94 169.979,75.324 170.053,75.25 170.6,75.25 170.796,75.054 170.796,74.932 171.228,74.5 R17.1@171.25,74.5
NetIC6_6: IC6.6 R37.2 | length 1.7
  L1 w0.152: R37.2@159.254,56.155 IC6.6@160.978,56.155
NetIC6_7: IC6.7 R35.2 | length 1.7
  L1 w0.152: R35.2@159.254,54.885 IC6.7@160.978,54.885
NetIC7A_5: IC7A.5 R18A.2 | length 9.4
  L1 w0.152: IC7A.5@34.75,68 34.778,68.028 35.176,68.028 36.458,69.31 v1(38.362,69.31) ; R18A.2@37.606,73.461 37.608,73.463 38.483,73.463 38.726,73.22 v1(38.726,72.865)
  L3 w0.152: v1(38.362,69.31) 38.726,69.674 v1(38.726,72.865)
NetIC7A_6: IC7A.6 IC7A.7 L18A.2 | length 3.8
  L1 w0.152: IC7A.6@34.75,68.5 34.778,68.528 35.133,68.528 35.15,68.545 35.29,68.545 35.38,68.634 35.38,68.795 35.4,68.815 ; IC7A.7@34.75,69 34.758,68.992 35.223,68.992 35.4,68.815 ; L18A.2@37.12,69.95 36.913,69.743 36.328,69.743 35.4,68.815
NetIC7A_38: IC7A.38 R19A.2 R29A.2 R59A.2 R60A.2 | length 19.4
  L1 w0.152: R19A.2@28.75,61.53 28.964,61.744 29.329,61.744 29.365,61.78 30.578,61.78 33,64.202 33,64.298 ; IC7A.38@33,65.25 33,64.952 33,64.298 ; R60A.2@44.841,62.59 44.7,62.731 44.226,62.731 44.027,62.532 41.631,62.532 41.573,62.59 R59A.2@40.41,62.59 39.928,62.59 39.68,62.838 38.884,62.838 38.578,62.532 37.643,62.532 36.936,63.239 R29A.2@35.946,63.239 35.732,63.453 33.846,63.453 33,64.298
NetIC7B_5: IC7B.5 R18B.2 | length 9.4
  L1 w0.152: IC7B.5@34.75,31 35.004,31 35.27,31.266 35.413,31.266 36.458,32.31 v1(38.35,32.31) ; R18B.2@37.606,36.461 37.608,36.463 38.579,36.463 38.645,36.397 38.645,36.071 v1(38.668,36.048)
  L3 w0.152: v1(38.35,32.31) 38.668,32.629 v1(38.668,36.048)
NetIC7B_6: IC7B.6 IC7B.7 L18B.2 | length 3.8
  L1 w0.152: IC7B.6@34.75,31.5 34.778,31.528 35.133,31.528 35.15,31.545 35.29,31.545 35.38,31.634 35.38,31.795 36.291,32.706 36.876,32.706 L18B.2@37.12,32.95 ; IC7B.7@34.75,32 34.758,31.992 35.223,31.992 35.4,31.815
NetIC7B_38: IC7B.38 R19B.2 R29B.2 R59B.2 R60B.2 | length 19.5
  L1 w0.152: R19B.2@28.75,24.53 28.964,24.744 29.329,24.744 29.365,24.78 30.578,24.78 33,27.202 33,27.298 ; IC7B.38@33,28.25 33,27.952 33,27.298 ; R60B.2@44.841,25.59 44.7,25.731 44.226,25.731 44.027,25.532 41.631,25.532 41.573,25.59 R59B.2@40.41,25.59 40.196,25.804 39.959,25.804 39.815,25.948 38.994,25.948 38.578,25.532 37.643,25.532 36.936,26.239 R29B.2@35.946,26.239 35.732,26.453 33.846,26.453 33,27.298
NetIC8_5: IC8.5 R80.1 R81.2 | length 3
  L1 w0.152: IC8.5@147.106,72.74 147.106,71.319 147.54,70.885 R80.1@147.54,70.865 148.508,70.865 R81.2@148.524,70.881
NetIC9A_10: IC9A.10 R24A.1 | length 4.7
  L1 w0.152: IC9A.10@21.74,77.18 21.74,77.43 22.297,77.987 25.241,77.987 25.382,77.846 R24A.1@25.382,77.375
NetIC9B_10: IC9B.10 R24B.1 | length 4.6
  L1 w0.152: IC9B.10@21.74,40.18 21.74,40.43 22.246,40.936 25.292,40.936 25.382,40.846 R24B.1@25.382,40.375
NetIC10A_1: IC10A.1 IC11A.4 R23A.2 | length 29.4
  L1 w0.152: R23A.2@43.16,77.845 43.374,77.631 44.119,77.631 IC10A.1@44.25,77.5 ; IC10A.1@44.49,77.43 44.74,77.43 45.264,76.906 45.264,76.806 46.036,76.033 47.724,76.033 48.215,75.542 48.215,74.821 49.821,73.215 56.219,73.215 57.75,74.746 57.75,77.162 58.838,78.25 62.143,78.25 65.1,75.293 65.557,75.293 IC11A.4@65.675,75.175
NetIC10B_1: IC10B.1 IC11B.4 R23B.2 | length 29.5
  L1 w0.152: R23B.2@43.16,40.845 43.374,40.631 44.119,40.631 IC10B.1@44.25,40.5 ; IC10B.1@44.49,40.43 44.714,40.206 45.5,40.206 46.673,39.033 47.724,39.033 48.158,38.6 48.158,37.878 49.821,36.215 56.466,36.215 57.75,37.499 57.75,40.162 58.828,41.241 62.22,41.241 65.136,38.324 65.526,38.324 IC11B.4@65.675,38.175
NetIC11A_5: IC11A.5 R25A.1 | length 2.2
  L1 w0.152: IC11A.5@65.95,75.825 65.956,75.831 66.904,75.831 67.218,76.145 67.895,76.145 R25A.1@68,76.25
NetIC11B_5: IC11B.5 R25B.1 | length 2.2
  L1 w0.152: IC11B.5@65.95,38.825 65.956,38.831 66.904,38.831 67.218,39.145 67.895,39.145 R25B.1@68,39.25
NetIC12A_4: IC12A.4 R32A.2 R33A.2 | length 2.5
  L1 w0.152: R32A.2@37,76 37.02,76 37.234,76.214 37.234,76.434 37.25,76.45 R33A.2@37.25,76.78 37.27,76.78 37.685,77.195 38.362,77.195 IC12A.4@38.586,77.419
NetIC12B_4: IC12B.4 R32B.2 R33B.2 | length 2.5
  L1 w0.152: R32B.2@37,39 37.02,39 37.234,39.214 37.234,39.434 37.25,39.45 R33B.2@37.25,39.78 37.27,39.78 37.685,40.195 38.362,40.195 IC12B.4@38.586,40.419
NetIC13_7: IC13.7 R39.2 | length 1.6
  L1 w0.152: R39.2@159.448,42.227 159.453,42.222 IC13.7@161.078,42.222
NetIC14_2: IC14.2 R42.2 | length 1.6
  L1 w0.152: R42.2@159.437,37.501 IC14.2@161.067,37.501
NetIC14_3: IC14.3 R43.2 | length 1.6
  L1 w0.152: R43.2@159.437,36.231 IC14.3@161.067,36.231
NetIC15_6: IC15.6 R47.2 | length 1.6
  L1 w0.152: R47.2@159.47,31.899 IC15.6@161.024,31.899
NetIC15_7: IC15.7 R45.2 | length 1.6
  L1 w0.152: R45.2@159.47,30.696 160.957,30.696 IC15.7@161.024,30.629
NetIC17A_2: IC17A.2 IC24A.4 | length 7.7
  L1 w0.152: IC24A.4@79.833,74.895 81.138,74.895 81.49,74.544 83.583,74.544 84.61,75.57 84.61,76.204 85.665,77.259 IC17A.2@85.94,77.259
NetIC17B_2: IC17B.2 IC24B.4 | length 7.3
  L1 w0.152: IC24B.4@79.833,37.895 81.274,37.895 81.501,37.669 83.075,37.669 85.665,40.259 IC17B.2@85.94,40.259
NetIC21_6: IC21.6 R119.2 | length 1.6
  L1 w0.152: IC21.6@140.305,12.775 R119.2@140.305,14.415
NetIC21_7: IC21.7 R117.2 | length 1.6
  L1 w0.152: IC21.7@139.035,12.775 R117.2@139.035,14.415
NetIC24A_1: IC24A.1 IC24B.1 R20.2 T2.3 T8A.1 T8B.1 T11.1 | length 320.3
  L1 w0.152: v1(45.746,25.869) 46.077,25.538 T8B.1@46.077,23.96 ; v1(45.762,62.853) 46.077,62.538 T8A.1@46.077,60.96 ; IC24B.1@77.233,39.795 77.457,39.571 78.679,39.571 79.5,38.75 80.814,38.75 81.443,38.122 v1(82.515,38.122) ; IC24A.1@77.233,76.795 77.483,76.795 77.778,76.5 78.75,76.5 79.5,75.75 80.678,75.75 81.432,74.997 v1(82.581,74.997) ; v1(119.588,28.648) 119.588,30.611 119.707,30.73 119.707,32.777 118.498,33.986 118.498,41.639 118.672,41.812 118.672,47.933 119.39,48.651 119.39,66.137 v1(120.134,66.881) ; v1@120.079,66.921 119.578,67.422 119.578,69.078 ; v1(120.197,69.373) 120.197,69.334 119.941,69.078 119.578,69.078 ; T11.1@122.166,88.186 122.166,87.458 122.7,86.924 122.892,86.924 123.116,86.7 T2.3@123.116,86.5 ; R20.2@125.361,86.97 125.341,86.97 124.871,86.5 T2.3@123.116,86.5 ; 119.578,69.078 119.578,80.115 123.116,83.653 T2.3@123.116,86.5
  L3 w0.152: v1(45.746,25.869) 45.778,25.869 47.337,27.428 47.337,28.212 47.986,28.861 92.056,28.861 92.25,28.668 92.625,28.668 92.819,28.861 102.264,28.861 102.517,29.114 102.862,29.848 103.652,30.638 103.766,30.681 103.797,30.692 103.82,30.716 103.952,30.848 104.19,30.848 104.195,30.853 106.805,30.853 106.81,30.848 107.126,30.848 107.465,30.509 107.667,30.307 109.254,28.721 118.332,28.721 118.47,28.583 119.522,28.583 v1(119.588,28.648) ; v1(45.762,62.853) 47.337,64.428 47.337,65.212 47.986,65.861 53.535,65.861 54.04,65.356 58.62,65.356 58.798,65.534 96.716,65.534 97.472,64.778 100.855,64.778 100.949,64.81 101.53,65.39 101.668,66.093 103.318,67.743 103.65,67.743 103.768,67.861 106.923,67.861 107.348,67.638 108.138,66.848 108.247,66.611 108.297,66.487 108.562,66.222 109.488,66.222 109.522,66.188 118.552,66.188 119.246,66.881 v1(120.134,66.881) ; v1(82.515,38.122) 84.872,38.122 84.926,38.175 85.302,38.175 85.355,38.122 96.382,38.122 98.328,36.176 99.095,36.176 99.361,35.91 99.361,35.644 99.872,35.133 100.119,35.133 102.579,32.674 102.869,32.674 102.912,32.631 107.869,32.631 109.035,31.465 109.383,31.465 110.095,30.753 116.035,30.753 116.541,31.259 119.444,31.259 119.45,31.265 119.641,31.265 v1(119.707,31.332) ; v1(82.581,74.997) 91.931,74.997 91.97,74.99 98.749,72.578 98.776,72.569 100.264,71.616 100.454,71.616 100.81,71.419 100.844,71.393 102.183,70.055 107.426,70.055 107.754,70.382 108.201,70.382 110.363,68.22 114.032,68.22 114.884,69.072 117.595,69.072 117.896,69.373 v1(120.197,69.373)
NetIC24A_2: IC24A.2 R25A.2 | length 7.8
  L1 w0.152: R25A.2@69.64,76.2 75.05,76.2 75.405,75.845 IC24A.2@77.233,75.845 ; IC24A.2@77.233,75.75 IC24A.2@77.25,75.75
NetIC24B_2: IC24B.2 R25B.2 | length 7.8
  L1 w0.152: R25B.2@69.64,39.2 75.05,39.2 75.405,38.845 IC24B.2@77.233,38.845 ; IC24B.2@77.233,38.75 IC24B.2@77.25,38.75
NetIC28_7: IC28.7 R82.1 R83.2 | length 2.7
  L1 w0.152: R82.1@137.109,74.025 137.126,74.042 R83.2@138.104,74.042 137.909,74.237 IC28.7@137.909,75.686
NetIC29_4: IC29.4 R41.2 | length 1.2
  L4 w0.254: IC29.4@169,78.25 169.076,78.326 169.076,79.362 R41.2@169.019,79.42
NetIC29_5: IC29.5 R40.1 R48.2 | length 10.2
  L1 w0.254: v1(172,82.25) 172.5,81.75 v1(172.5,80.75)
  L4 w0.254: R40.1@166.655,82.69 166.655,82.67 166.818,82.507 166.838,82.507 167.095,82.25 171.75,82.25 v1(172,82.25) ; IC29.5@171.979,78.14 172,78.161 172,79.701 171.979,79.722 171.979,80.371 172.311,80.703 172.453,80.703 v1(172.5,80.75)
NetIC29_7: IC29.7 R49.1 R50.2 | length 2.2
  L4 w0.254: IC29.7@171.979,77.14 172.002,77.117 172.633,77.117 R50.2@173,76.75 ; R50.2@173.229,76.66 174.16,76.66 R49.1@174.25,76.75
NetIC34_2: IC34.2 R101.1 | length 1.3
  L1 w0.127: IC34.2@169.2,69.7 169.2,70.436 169.243,70.479 169.243,70.977 R101.1@169.22,71
NetIC34_4: IC34.4 R98.1 R102.2 | length 3.6
  L1 w0.127: R102.2@166.53,71 166.53,70.98 166.304,70.754 166.181,70.754 166.078,70.65 R98.1@166.078,70.17 168.126,70.17 168.138,70.157 168.138,69.762 IC34.4@168.2,69.7
NetIC35_5: IC35.5 R100.1 R103.2 | length 3.1
  L1 w0.127: IC35.5@146.98,58.955 148.115,58.955 148.664,58.407 R100.1@148.684,58.407 R103.2@148.684,59.58
NetJ1_A5: J1.A5 R94.1 | length 2.6
  L1 w0.254: J1.A5@4.35,13.536 4.35,14.576 4.661,14.887 R94.1@4.661,16.002
NetJ1_B5: J1.B5 R95.1 | length 2.9
  L1 w0.152: J1.B5@5.7,12.535 5.7,9.713 R95.1@5.72,9.693
NetJ2A_1: J2A.1 R4A.1 | length 1.5
  L1 w0.152: R4A.1@87.26,68.17 R4A.1@87.28,68.19
  L1 w0.643: R4A.1@87.301,68.366 J2A.1@87.301,69.851
NetJ2B_1: J2B.1 R4B.1 | length 1.5
  L1 w0.152: R4B.1@87.26,31.17 R4B.1@87.28,31.19
  L1 w0.643: R4B.1@87.301,31.366 J2B.1@87.301,32.851
NetJ11_2: J11.2 T14.3 | length 6.1
  L1 w0.254: J11.2@189.725,73.45 189.625,73.55 189.625,76.675 191.127,78.177 191.127,78.377 191.325,78.575 T14.3@191.525,78.575
NetLD10_1: LD10.1 R55.2 | length 1.5
  L1 w0.254: LD10.1@-1.525,58.325 -1.5,58.3 R55.2@-1.5,56.875
NetLD11_2: LD11.2 R218.2 | length 3.3
  L1 w0.508: R218.2@140.55,89.17 LD11.2@140.55,92.425
NetLD12_2: LD12.2 R106.2 | length 2.2
  L1 w0.508: R106.2@137.909,90.252 LD12.2@137.909,92.425
NetLD13_2: LD13.2 R107.2 | length 2.9
  L1 w0.508: R107.2@143.432,89.408 LD13.2@143.432,92.325
NetLD14_2: LD14.2 R108.2 | length 2.2
  L1 w0.508: R108.2@132.8,90.252 LD14.2@132.8,92.425
NetLD16_2: LD16.2 R110.2 | length 2.1
  L1 w0.254: R110.2@127,90.3 LD16.2@127,92.366
NetLD18_2: LD18.2 R216.2 | length 2.1
  L1 w0.508: R216.2@135.369,90.3 LD18.2@135.369,92.425
NetR11_2: R11.2 T1.3 | length 1.5
  L1 w0.127: R11.2@49.16,95.6 50.655,95.6 T1.3@50.685,95.57
NetR12_2: R12.2 T3.3 | length 1.4
  L1 w0.152: R12.2@55.535,95.36 56.315,95.36 56.614,95.659 T3.3@56.814,95.659
NetR14_2: R14.2 T4.3 | length 1.5
  L1 w0.152: R14.2@56.576,5.468 T4.3@58.086,5.468
NetR15_2: R15.2 T12.3 | length 1.6
  L1 w0.152: R15.2@62.949,5.508 T12.3@64.538,5.508
NetR29A_1: R29A.1 T6A.3 | length 2.6
  L1 w0.152: R29A.1@35.946,64.179 36.155,63.97 36.606,63.97 37.316,63.26 T6A.3@38.168,63.26
NetR29B_1: R29B.1 T6B.3 | length 2.6
  L1 w0.152: R29B.1@35.946,27.179 36.155,26.97 36.606,26.97 37.316,26.26 T6B.3@38.168,26.26
NetR55_1: R55.1 U1.6 | length 312.6
  L1 w0.152: R55.1@-1.475,55.905 -1.475,43.875 -0.747,43.147 -0.747,40.278 -0.775,40.25 -0.775,37.725 v1(-0.825,37.675) ; v1@120.281,17.5 120.281,15.653 v1(120.294,15.64) ; U1.6@195.2,73.225 195.2,72.27 202.25,65.22 202.25,52.01 210.217,44.043 210.217,22.981 209.593,22.356 v1(209.593,22.289)
  L3 w0.152: v1(-0.825,37.675) -0.825,37.291 -0.763,37.229 -0.763,36.812 -0.825,36.75 -0.825,33.54 -0.455,33.17 -0.455,29.13 -0.112,28.787 -0.112,26.364 -0.004,26.256 -0.004,25.294 -0.112,25.186 -0.112,22.61 0.725,21.773 0.725,21.011 0.831,20.905 0.831,20.488 0.725,20.382 0.725,18.061 1.978,16.808 9.058,16.808 9.5,17.25 17.725,17.25 17.8,17.175 37.325,17.175 38.125,17.975 75.863,17.975 76.663,17.175 114.4,17.175 114.725,17.5 v1(120.275,17.5) ; v1(120.294,15.64) 120.305,15.651 122.173,15.651 123.002,14.822 129.83,14.822 130.041,15.033 136.421,15.033 136.456,15.068 137.33,15.068 137.365,15.033 141.353,15.033 141.864,14.522 146.429,14.522 146.729,14.822 188.636,14.822 190.114,16.3 203.604,16.3 208.952,21.648 209.217,21.913 v1(209.593,22.289)
NetR56_1: R56.1 R58.2 RT1.1 U1.1 | length 151.8
  L1 w0.152: RT1.1@52.825,54.75 52.853,54.722 v1(53.775,54.722) ; R56.1@190.4,68.375 190.5,68.275 R58.2@190.5,67.25 190.475,67.225 v1(190.475,58) ; R56.1@190.575,68.325 U1.1@192.66,68.325
  L3 w0.152: v1(53.775,54.722) 83.471,54.722 83.676,54.517 115.667,54.517 117.55,56.4 167.05,56.4 168.621,57.971 190.396,57.971 v1@190.5,58.075
NetR59A_1: R59A.1 T7A.3 | length 2.3
  L1 w0.152: R59A.1@40.41,63.53 42.311,63.53 42.56,63.281 T7A.3@42.56,63.26
NetR59B_1: R59B.1 T7B.3 | length 2.3
  L1 w0.152: R59B.1@40.41,26.53 42.311,26.53 42.56,26.281 T7B.3@42.56,26.26
NetR60A_1: R60A.1 T8A.3 | length 2.5
  L1 w0.152: R60A.1@44.841,63.53 44.997,63.686 46.778,63.686 47.027,63.437 T8A.3@47.027,63.26
NetR60B_1: R60B.1 T8B.3 | length 2.7
  L1 w0.152: R60B.1@44.841,26.53 45.055,26.744 45.384,26.744 45.456,26.816 45.762,26.816 45.869,26.709 46.778,26.709 47.027,26.46 T8B.3@47.027,26.26
NetR64_2: R64.2 T11.3 | length 1.5
  L1 w0.152: T11.3@123.116,90.486 123.14,90.51 R64.2@123.14,91.974
NetR72_1: R72.1 T17.3 | length 1.6
  L1 w0.152: T17.3@164.575,94.575 R72.1@166.142,94.575
NetR74_2: R74.2 T9.3 | length 1.3
  L1 w0.152: R74.2@91.349,95.3 T9.3@92.641,95.3
NetR84_2: R84.2 T10.3 | length 2.4
  L1 w0.152: T10.3@91.292,5.526 R84.2@91.292,7.898
NetR105_1: R105.1 RT1.2 | length 149.4
  L1 w0.152: RT1.2@51.125,54.75 51.15,54.775 v1(51.9,54.775) ; v1(191.425,58.55) 191.425,65.72 R105.1@191.455,65.75
  L3 w0.152: v1(51.9,54.775) 52.3,55.175 83.413,55.175 83.792,54.797 115.472,54.797 117.354,56.679 166.929,56.679 168.5,58.25 186.054,58.25 186.354,58.55 v1@191.45,58.55
NetT14_1: T14.1 U1.7 | length 4.3
  L1 w0.254: T14.1@193.825,77.625 194.025,77.625 194.725,76.925 194.725,74.92 194.055,74.25 U1.7@193.9,74.25
NetT_C2_1: T_C2.1 T_IC1.5 T_R2.1 | length 5.4
  L1 w0.508: T_R2.1@188.695,15.79 T_C2.1@191.781,15.79 192.012,15.559 T_IC1.5@192.012,13.533
NetT_C11_1: T_C11.1 T_FL1.3 T_J6.1 T_J6.2
NetT_C11_2: T_C11.2 T_FL1.1 T_J6.3 T_J6.4
NetT_C13_1: T_C13.1 T_IC7.5 T_R29.2 T_R30.2 | length 3.9
  L1 w0.257: T_C13.1@201.948,29.122 201.968,29.142 T_R30.2@201.968,30.372 ; T_R29.2@202.006,27.987 201.993,28 201.993,29.072 T_IC7.5@203.553,29.072
NetT_C14_1: T_C14.1 T_C21.2 | length 1
  L1 w0.257: T_C14.1@204.348,33.13 T_C21.2@205.34,33.13
NetT_C15_1: T_C15.1 T_T5.3 | length 11.8
  L1 w0.257: T_C15.1@204.348,32.11 204.399,32.059 204.893,32.059 205.439,31.514 205.439,25.43 207.074,23.795 T_T5.3@209.164,23.795
NetT_C17_1: T_C17.1 T_T2.3 | length 5.5
  L1 w0.257: T_C17.1@204.348,36.148 204.449,36.047 206.305,36.047 207.765,34.588 T_T2.3@209.164,34.588
NetT_C18_1: T_C18.1 T_C19.1 T_T3.3 | length 8.4
  L1 w0.257: T_C19.1@204.348,35.128 T_C18.1@204.348,34.128 206.429,34.128 207.21,33.347 207.21,31.164 207.34,31.034 207.389,30.985 T_T3.3@209.164,30.985
NetT_C21_1: T_C21.1 T_T4.3 | length 7
  L1 w0.257: T_C21.1@206.263,33.13 206.263,33.107 206.422,32.949 206.445,32.949 206.818,32.576 206.818,30.895 209.164,28.549 T_T4.3@209.164,27.362
NetT_D2_4: T_D2.4 T_J4.H2 T_R15.2 | length 24.8
  L1 w0.127: T_R15.2@186.522,9.236 186.522,9.234 186.748,9.007 186.909,9.007 186.938,8.978 T_D2.4@187.503,8.978 187.496,8.985 v1(187.496,10.353) ; v1(195.175,7.625) 195.194,7.606 207.133,7.606 T_J4.H2@208.239,6.5
  L4 w0.127: v1(187.496,10.353) 191.797,10.353 192.557,9.593 193.207,9.593 v1(195.175,7.625)
NetT_D2_6: T_D2.6 T_J4.K2 T_R17.2 | length 20.5
  L1 w0.127: T_R17.2@186.522,7.969 186.531,7.978 T_D2.6@187.503,7.978 187.496,7.971 v1(187.496,7.324)
  L4 w0.127: v1(187.496,7.324) 189.81,9.639 192.127,9.639 194.582,7.184 195.357,7.184 195.413,7.241 203.298,7.241 T_J4.K2@204.039,6.5
NetT_D6_2: T_D6.2 T_IC7.3 | length 1.7
  L1 w0.257: T_D6.2@206.189,31.689 206.253,31.625 T_IC7.3@206.253,30.022
NetT_IC1_3: T_IC1.3 T_R4.2 T_R7.2 | length 5.6
  L1 w0.3: T_R7.2@190.334,13.063 T_R4.2@190.334,11.953 193.736,11.953 193.912,11.777 T_IC1.3@193.912,10.933
NetT_IC6_7: T_IC6.7 T_R25.2 | length 1.7
  L4 w0.257: T_IC6.7@45.51,93.076 47.009,93.076 47.17,93.238 T_R25.2@47.17,93.255
NetT_LD1_2: T_LD1.2 T_R1.1 | length 1.2
  L1 w0.152: T_LD1.2@148.975,92.275 148.975,91.171 T_R1.1@149.026,91.12
NetT_LD2_1: T_LD2.1 T_T1.3 | length 96.6
  L1 w0.152: T_LD2.1@-1.5,19.5 -1.5,18.857 -1.553,18.804 -1.553,17.836 -1.368,17.651 -1.368,17.242 v1(-1.301,17.175) ; v2(82.035,3.226) 82.943,4.134 83.153,4.134 83.402,4.382 T_T1.3@83.402,4.543
  L3 w0.152: v1(-1.301,17.175) -1.301,15.969 -1.5,15.771 -1.5,14.659 -1.274,14.433 -1.274,12.422 1.123,10.025 3.404,10.025 3.966,9.464 5.74,9.464 11.774,3.429 36.74,3.429 36.914,3.603 55.613,3.603 55.99,3.226 v2(82.035,3.226)
NetT_LD2_2: T_LD2.2 T_R3.2 | length 10.9
  L1 w0.254: T_LD2.2@-1.5,21.5 -0.475,21.5 v2(0.328,20.696) ; v2(5.6,17.65) 6.252,17.65 T_R3.2@6.575,17.975 T_R3.2@6.575,17.975
  L4 w0.254: v2(0.328,20.696) 0.328,19.047 1.879,17.496 3.944,17.496 4.098,17.65 v2(5.6,17.65)
NetT_LD4_2: T_LD4.2 T_R6.1 | length 2.2
  L1 w0.254: T_R6.1@129.901,90.272 129.901,92.387 T_LD4.2@129.959,92.445
OVTn: IC8.1 IC28.2 IC34.14 R61.1 T2.1 T_IC4.3 | length 254.4
  L1 w0.152: v1(119.2,95.3) 119.2,84.2 ; v1(119.282,15.18) 119.308,15.207 119.308,22.13 119.134,22.304 119.134,32.788 118.219,33.704 118.219,41.754 118.392,41.928 118.392,48.049 119.11,48.767 119.11,79.126 119.2,79.216 119.2,84.2 ; T2.1@122.166,84.2 119.2,84.2 ; IC28.2@137.909,81.086 138.074,81.251 138.074,83 138.174,83.1 v1(141.161,83.1) ; v1(141.036,72.874) 141.892,72.874 IC8.1@142.026,72.74 ; IC34.14@170.35,68.05 v1(171.073,68.05)
  L3 w0.152: v1(37.614,15.454) 64.249,15.454 64.488,15.694 91.447,15.694 91.943,15.198 119.264,15.198 v1(119.282,15.18) ; v1(119.2,95.3) 127.853,95.3 128.153,95 v1(140.766,95) ; v1(141.036,72.874) v1@171.049,72.874
  L4 w0.152: T_IC4.3@36.471,15.454 v1(37.614,15.454) 38.091,14.978 R61.1@38.649,14.978 ; v1(140.766,95) 141.161,94.605 v1(141.161,83.1) 141.161,83.047 140.766,82.652 140.766,73.144 v1(141.036,72.874) ; v1(170.95,72.9) 170.95,72.806 171.073,72.683 v1(171.073,68.05)